# EAGLE board 2x7-breakout (EAGLE 9.7.0)
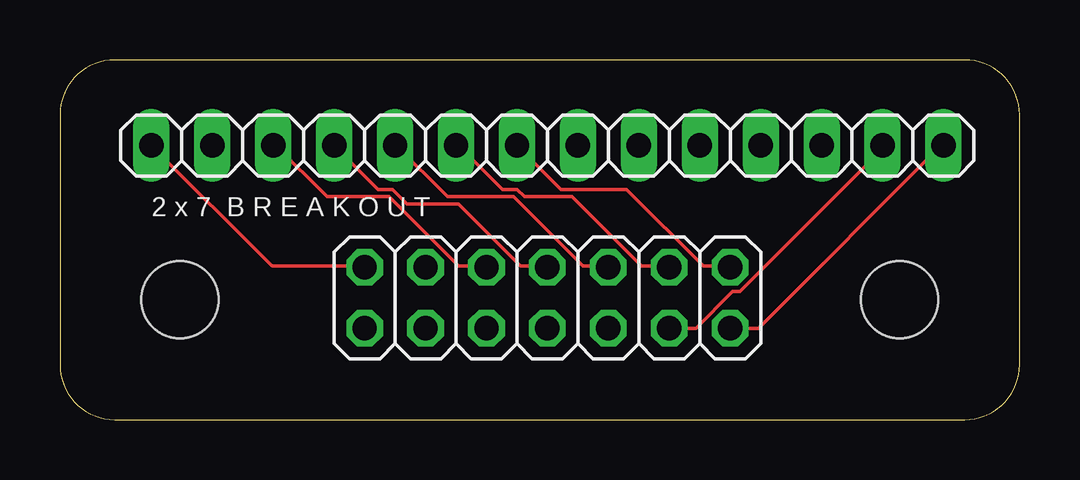
[diagram p0: board, top side]
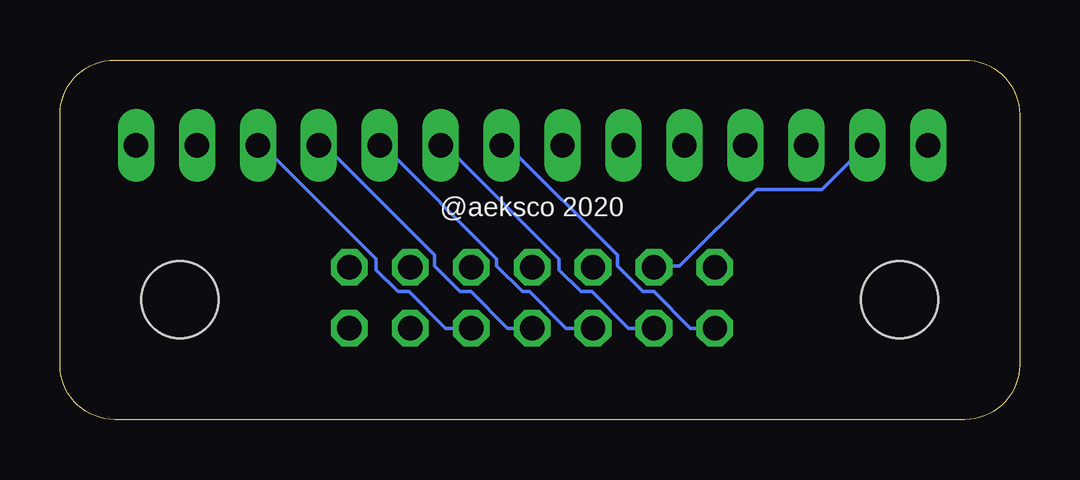
[diagram p1: board, bottom side, seen from below]

Size 40 x 15 mm. Coordinates in mm from the lower left corner, seen from the top.
Outline: 0,12.71 0,2.29 arc90 2.29,0 37.71,0 arc90 40,2.29 40,12.71 arc90 37.71,15 2.29,15 arc90 0,12.71
Copper layers (1*16): Top 0.035mm / dielectric 1.5mm / Bottom 0.035mm
Design rules "default": minimum track width 6mil, minimum drill 0.35mm, track to track 6mil, track to pad 6mil, pad to pad 6mil, via to via 6mil, smd to smd 6mil, copper to edge 40mil, drill to drill 6mil, minimum pad ring 10mil, minimum via ring 8mil, stop-mask expansion 4mil, vias tented up to drill 0mil, thermal gap 10mil
Holes 3.2 mm at 5,5 35,5

## Footprints (pad centres in the part's own frame; a part is rotated, then mirrored left to right if it is on the bottom)
2X07 = drill 1.016 octagon: 1 -7.62,-1.27; 2 -7.62,1.27; 3 -5.08,-1.27; 4 -5.08,1.27; 5 -2.54,-1.27; 6 -2.54,1.27; 7 0,-1.27; 8 0,1.27; 9 2.54,-1.27; 10 2.54,1.27; 11 5.08,-1.27; 12 5.08,1.27; 13 7.62,-1.27; 14 7.62,1.27
1X14 = drill 1.016 long: 1 -16.51,0; 2 -13.97,0; 3 -11.43,0; 4 -8.89,0; 5 -6.35,0; 6 -3.81,0; 7 -1.27,0; 8 1.27,0; 9 3.81,0; 10 6.35,0; 11 8.89,0; 12 11.43,0; 13 13.97,0; 14 16.51,0

## Placement (x,y rotation side)
JP1  PINHD-2X7  [2X07]  20.32,5.08 0 top
JP2  PINHD-1X14  [1X14]  20.32,11.43 0 top

## Library data of the parts
JP1 JP2 = Connector; CATEGORY: CONNECTOR; SUB-CATEGORY: PIN-HEADER

## Nets
N$1: JP1.2 JP2.1
N$2: JP1.4 JP2.2
N$3: JP1.6 JP2.3
N$4: JP1.8 JP2.4
N$5: JP1.10 JP2.5
N$6: JP1.12 JP2.6
N$7: JP1.14 JP2.7
N$8: JP1.13 JP2.14
N$9: JP1.11 JP2.13
N$10: JP1.9 JP2.12
N$11: JP1.7 JP2.11
N$12: JP1.5 JP2.10
N$13: JP1.3 JP2.9
N$14: JP1.1 JP2.8

## Tracks (layer width: path | path; a pad name or v marks a point on that pad's centre or on a via)
N$1
  Top 0.152: JP2.1 8.84,6.4 12.65,6.4 JP1.2
N$2
  Bottom 0.152: JP1.4 15.24,6.4 14.17,6.4 10.97,9.6 8.23,9.6 6.4,11.43 JP2.2
N$3
  Top 0.152: JP1.6 17.68,6.4 16.61,6.4 13.72,9.3 11.12,9.3 8.99,11.43 JP2.3
N$4
  Top 0.152: JP2.4 13.26,9.6 13.87,9.6 14.48,8.99 16.61,8.99 19.2,6.4 20.27,6.4 JP1.8
N$5
  Top 0.152: JP1.10 22.86,6.4 21.79,6.4 18.9,9.3 16.15,9.3 14.02,11.43 JP2.5
N$6
  Top 0.152: JP1.12 25.3,6.4 24.23,6.4 21.34,9.3 19.36,9.3 19.05,9.6 18.44,9.6 16.61,11.43 JP2.6
N$7
  Top 0.152: JP2.7 20.88,9.6 23.62,9.6 26.82,6.4 27.89,6.4 JP1.14
N$8
  Top 0.152: JP1.13 29.11,3.81 36.73,11.43 JP2.14
N$9
  Top 0.152: JP1.11 26.52,3.81 28.04,5.33 28.35,5.33 34.29,11.28 JP2.13
N$10
  Bottom 0.152: JP1.9 23.93,3.81 25.45,5.33 25.91,5.33 26.82,6.25 26.82,6.71 31.55,11.43 JP2.12
N$11
  Bottom 0.152: JP1.7 21.34,3.81 22.86,5.33 23.32,5.33 24.38,6.4 24.38,6.86 28.96,11.43 JP2.11
N$12
  Bottom 0.152: JP1.5 18.9,3.81 20.42,5.33 20.73,5.33 21.79,6.4 21.79,6.71 26.52,11.43 JP2.10
N$13
  Bottom 0.152: JP1.3 16.31,3.81 17.83,5.33 18.29,5.33 19.2,6.25 19.2,6.71 23.93,11.43 JP2.9
N$14
  Bottom 0.152: JP1.1 13.72,3.81 15.24,5.33 15.7,5.33 16.76,6.4 16.76,6.86 21.34,11.43 JP2.8

## Text on the board
tNames: 2 x 7 B R E A K O U T
bNames: @aeksco 2020